# EAGLE board fullSketcht (EAGLE 7.6.0)

Size 160 x 129.21 mm. Coordinates in mm from the lower left corner, seen from the top.
Outline: 0,0 160,0 160,129.21 0,129.21 0,0
Copper layers (1*16): Top 0.035mm / dielectric 1.5mm / Bottom 0.035mm
Design rules "default": minimum track width 10mil, minimum drill 24mil, track to track 8mil, track to pad 8mil, pad to pad 8mil, via to via 8mil, smd to smd 8mil, copper to edge 40mil, drill to drill 8mil, minimum pad ring 10mil, minimum via ring 8mil, stop-mask expansion 4mil, vias tented up to drill 0mil, thermal gap 10mil
Net classes: 0 default: clearance 0.254 mm

## Footprints (pad centres in the part's own frame; a part is rotated, then mirrored left to right if it is on the bottom)
7SEG-13 = drill 0.813 long: 1 -5.08,-7.62; 2 -2.54,-7.62; 3 0,-7.62; 4 2.54,-7.62; 5 5.08,-7.62; 6 5.08,7.62; 7 2.54,7.62; 8 0,7.62; 9 -2.54,7.62; 10 -5.08,7.62
SO16 = smd 0.66 x 2.032: 1 -4.445,-3.073; 2 -3.175,-3.073; 3 -1.905,-3.073; 4 -0.635,-3.073; 5 0.635,-3.073; 6 1.905,-3.073; 7 3.175,-3.073; 8 4.445,-3.073; 9 4.445,3.073; 10 3.175,3.073; 11 1.905,3.073; 12 0.635,3.073; 13 -0.635,3.073; 14 -1.905,3.073; 15 -3.175,3.073; 16 -4.445,3.073
DIL18 = drill 0.813 long: 1 -10.16,-3.81; 2 -7.62,-3.81; 3 -5.08,-3.81; 4 -2.54,-3.81; 5 0,-3.81; 6 2.54,-3.81; 7 5.08,-3.81; 8 7.62,-3.81; 9 10.16,-3.81; 10 10.16,3.81; 11 7.62,3.81; 12 5.08,3.81; 13 2.54,3.81; 14 0,3.81; 15 -2.54,3.81; 16 -5.08,3.81; 17 -7.62,3.81; 18 -10.16,3.81
TO18 = drill 0.813 octagon: 1 -1.27,-1.27; 2 1.27,-1.27; 3 1.27,1.27
22-23-2081 = drill 1 long: 1 -8.89,0; 2 -6.35,0; 3 -3.81,0; 4 -1.27,0; 5 1.27,0; 6 3.81,0; 7 6.35,0; 8 8.89,0

## Placement (x,y rotation side)
D1  [7SEG-13]  35.56,71.12 0 top
D2  [7SEG-13]  48.26,71.12 0 top
D3  [7SEG-13]  60.96,71.12 0 top
D4  [7SEG-13]  73.66,71.12 0 top
D5  [7SEG-13]  86.36,71.12 0 top
D6  [7SEG-13]  99.06,71.12 0 top
D7  [7SEG-13]  111.76,71.12 0 top
D8  [7SEG-13]  124.46,71.12 0 top
D9  [7SEG-13]  8.89,44.45 0 top
D10  [7SEG-13]  21.59,44.45 0 top
D11  [7SEG-13]  34.29,44.45 0 top
D12  [7SEG-13]  46.99,44.45 0 top
D13  [7SEG-13]  59.69,44.45 0 top
D14  [7SEG-13]  88.9,44.45 0 top
D15  [7SEG-13]  101.6,44.45 0 top
D16  [7SEG-13]  114.3,44.45 0 top
D17  [7SEG-13]  127,44.45 0 top
D18  [7SEG-13]  139.7,44.45 0 top
D19  [7SEG-13]  8.89,22.86 0 top
D20  [7SEG-13]  21.59,22.86 0 top
D21  [7SEG-13]  34.29,22.86 0 top
D22  [7SEG-13]  46.99,22.86 0 top
D23  [7SEG-13]  59.69,22.86 0 top
D24  [7SEG-13]  88.9,22.86 0 top
D25  [7SEG-13]  101.6,22.86 0 top
D26  [7SEG-13]  114.3,22.86 0 top
D27  [7SEG-13]  127,22.86 0 top
D28  [7SEG-13]  139.7,22.86 0 top
D29  [7SEG-13]  8.89,3.81 0 top
D30  [7SEG-13]  21.59,3.81 0 top
D31  [7SEG-13]  34.29,3.81 0 top
D32  [7SEG-13]  46.99,3.81 0 top
D33  [7SEG-13]  59.69,3.81 0 top
D34  [7SEG-13]  88.9,3.81 0 top
D35  [7SEG-13]  101.6,3.81 0 top
D36  [7SEG-13]  114.3,3.81 0 top
D37  [7SEG-13]  127,3.81 0 top
D38  [7SEG-13]  139.7,3.81 0 top
IC1  74LS595D  [SO16]  87.63,95.25 0 top
IC2  74HC595D  [SO16]  87.63,120.65 0 top
IC3  74HC595D  [SO16]  58.42,118.11 0 top
IC4  74HC595D  [SO16]  101.6,107.95 0 top
IC5  74HC595D  [SO16]  139.7,101.6 0 top
IC6  [DIL18]  120.65,115.57 0 top
IC7  [DIL18]  73.66,105.41 0 top
IC8  [DIL18]  26.67,113.03 0 top
IC9  [DIL18]  33.02,88.9 0 top
IC10  [DIL18]  124.46,90.17 0 top
T1  2N2222  [TO18]  15.24,106.68 0 top
T2  2N2222  [TO18]  15.24,100.33 0 top
T3  2N2222  [TO18]  15.24,93.98 0 top
T4  2N2222  [TO18]  15.24,87.63 0 top
T5  2N2222  [TO18]  15.24,81.28 0 top
T6  2N2222  [TO18]  15.24,74.93 0 top
T7  2N2222  [TO18]  15.24,68.58 0 top
T8  2N2222  [TO18]  15.24,62.23 0 top
X1  22-23-2081  [22-23-2081]  5.08,88.9 90 top

## Library data of the parts
D1-D38 = special
IC1 = 74xx-us
IC2-IC5 = 74xx-eu
IC6-IC10 = uln-udn
T1-T8 = transistor
X1 = con-molex; MF: MOLEX; MPN: 22-23-2081; OC_FARNELL: 1756826; OC_NEWARK: 01C7592

## Nets
A: D1.7 D2.7 D3.7 D4.7 D5.7 D6.7 D7.7 D8.7 D9.7 D10.7 D11.7 D12.7 D13.7 D14.7 D15.7 D16.7 D17.7 D18.7 D19.7 D20.7 D21.7 D22.7 D23.7 D24.7 D25.7 D26.7 D27.7 D28.7 D29.7 D30.7 D31.7 D32.7 D33.7 D34.7 D35.7 D36.7 D37.7 D38.7 T1.1
B: D1.6 D2.6 D3.6 D4.6 D5.6 D6.6 D7.6 D8.6 D9.6 D10.6 D11.6 D12.6 D13.6 D14.6 D15.6 D16.6 D17.6 D18.6 D19.6 D20.6 D21.6 D22.6 D23.6 D24.6 D25.6 D26.6 D27.6 D28.6 D29.6 D30.6 D31.6 D32.6 D33.6 D34.6 D35.6 D36.6 D37.6 D38.6 T2.1
B1: T1.2 X1.8
B2: T2.2 X1.7
B3: T3.2 X1.6
B4: T4.2 X1.5
B5: T5.2 X1.4
B6: T6.2 X1.3
B7: T7.2 X1.2
B8: T8.2 X1.1
C: D1.4 D2.4 D3.4 D4.4 D5.4 D6.4 D7.4 D8.4 D9.4 D10.4 D11.4 D12.4 D13.4 D14.4 D15.4 D16.4 D17.4 D18.4 D19.4 D20.4 D21.4 D22.4 D23.4 D24.4 D25.4 D26.4 D27.4 D28.4 D29.4 D30.4 D31.4 D32.4 D33.4 D34.4 D35.4 D36.4 D37.4 D38.4 T3.1
D: D1.2 D2.2 D3.2 D4.2 D5.2 D6.2 D7.2 D8.2 D9.2 D10.2 D11.2 D12.2 D13.2 D14.2 D15.2 D16.2 D17.2 D18.2 D19.2 D20.2 D21.2 D22.2 D23.2 D24.2 D25.2 D26.2 D27.2 D28.2 D29.2 D30.2 D31.2 D32.2 D33.2 D34.2 D35.2 D36.2 D37.2 D38.2 T4.1
DS: IC1.14
E: D1.1 D2.1 D3.1 D4.1 D5.1 D6.1 D7.1 D8.1 D9.1 D10.1 D11.1 D12.1 D13.1 D14.1 D15.1 D16.1 D17.1 D18.1 D19.1 D20.1 D21.1 D22.1 D23.1 D24.1 D25.1 D26.1 D27.1 D28.1 D29.1 D30.1 D31.1 D32.1 D33.1 D34.1 D35.1 D36.1 D37.1 D38.1 T5.1
F: D1.9 D2.9 D3.9 D4.9 D5.9 D6.9 D7.9 D8.9 D9.9 D10.9 D11.9 D12.9 D13.9 D14.9 D15.9 D16.9 D17.9 D18.9 D19.9 D20.9 D21.9 D22.9 D23.9 D24.9 D25.9 D26.9 D27.9 D28.9 D29.9 D30.9 D31.9 D32.9 D33.9 D34.9 D35.9 D36.9 D37.9 D38.9 T6.1
G: D1.10 D2.10 D3.10 D4.10 D5.10 D6.10 D7.10 D8.10 D9.10 D10.10 D11.10 D12.10 D13.10 D14.10 D15.10 D16.10 D17.10 D18.10 D19.10 D20.10 D21.10 D22.10 D23.10 D24.10 D25.10 D26.10 D27.10 D28.10 D29.10 D30.10 D31.10 D32.10 D33.10 D34.10 D35.10 D36.10 D37.10 D38.10 T7.1
GND: IC1.8 IC1.13 IC2.8 IC2.13 IC3.8 IC3.13 IC4.8 IC4.13 IC5.8 IC5.13 IC6.9 IC7.9 IC8.9 IC9.9 IC10.9
H: D1.5 D2.5 D3.5 D4.5 D5.5 D6.5 D7.5 D8.5 D9.5 D10.5 D11.5 D12.5 D13.5 D14.5 D15.5 D16.5 D17.5 D18.5 D19.5 D20.5 D21.5 D22.5 D23.5 D24.5 D25.5 D26.5 D27.5 D28.5 D29.5 D30.5 D31.5 D32.5 D33.5 D34.5 D35.5 D36.5 D37.5 D38.5 T8.1
MR: IC1.10 IC2.10 IC3.10 IC4.10 IC5.10
N$86: IC1.15 IC6.1
N$87: IC1.1 IC6.2
N$88: IC1.2 IC6.3
N$89: IC1.3 IC6.4
N$90: IC1.4 IC6.5
N$91: IC1.5 IC6.6
N$92: IC1.6 IC6.7
N$93: IC1.7 IC6.8
N$94: IC1.9 IC2.14
N$95: IC2.15 IC7.1
N$96: IC2.1 IC7.2
N$97: IC2.2 IC7.3
N$98: IC2.3 IC7.4
N$99: IC2.4 IC7.5
N$100: IC2.5 IC7.6
N$101: IC2.6 IC7.7
N$102: IC2.7 IC7.8
N$103: IC2.9 IC3.14
N$104: IC3.15 IC8.1
N$105: IC3.1 IC8.2
N$106: IC3.2 IC8.3
N$107: IC3.3 IC8.4
N$108: IC3.4 IC8.5
N$109: IC3.5 IC8.6
N$110: IC3.6 IC8.7
N$111: IC3.7 IC8.8
N$112: IC3.9 IC4.14
N$113: IC4.15 IC9.1
N$114: IC4.1 IC9.2
N$115: IC4.2 IC9.3
N$116: IC4.3 IC9.4
N$117: IC4.4 IC9.5
N$118: IC4.5 IC9.6
N$119: IC4.6 IC9.7
N$120: IC4.7 IC9.8
N$121: IC4.9 IC5.14
N$122: IC5.15 IC10.1
N$123: IC5.1 IC10.2
N$124: IC5.2 IC10.3
N$125: IC5.3 IC10.4
N$126: IC5.4 IC10.5
N$127: IC5.5 IC10.6
N$128: IC5.6 IC10.7
N$129: IC5.7 IC10.8
SEG1: D1.3 IC6.18
SEG2: D2.3 IC6.17
SEG3: D3.3 IC6.16
SEG4: D4.3 IC6.15
SEG5: D5.3 IC6.14
SEG6: D6.3 IC6.13
SEG7: D7.3 IC6.12
SEG8: D8.3 IC6.11
SEG9: D9.3 IC7.18
SEG10: D10.3 IC7.17
SEG11: D11.3 IC7.16
SEG12: D12.3 IC7.15
SEG13: D13.3 IC7.14
SEG14: D14.3 IC7.13
SEG15: D15.3 IC7.12
SEG16: D16.3 IC7.11
SEG17: D17.3 IC8.18
SEG18: D18.3 IC8.17
SEG19: D19.3 IC8.16
SEG20: D20.3 IC8.15
SEG21: D21.3 IC8.14
SEG22: D22.3 IC8.13
SEG23: D23.3 IC8.12
SEG24: D24.3 IC8.11
SEG25: D25.3 IC9.18
SEG26: D26.3 IC9.17
SEG27: D27.3 IC9.16
SEG28: D28.3 IC9.15
SEG29: D29.3 IC9.14
SEG30: D30.3 IC9.13
SEG31: D31.3 IC9.12
SEG32: D32.3 IC9.11
SEG33: D33.3 IC10.18
SEG34: D34.3 IC10.17
SEG35: D35.3 IC10.16
SEG36: D36.3 IC10.15
SEG37: D37.3 IC10.14
SEG38: D38.3 IC10.13
SH_CP: IC1.11 IC2.11 IC3.11 IC4.11 IC5.11
ST_CP: IC1.12 IC2.12 IC3.12 IC4.12 IC5.12
VCC: IC1.16 IC2.16 IC3.16 IC4.16 IC5.16 IC6.10 IC7.10 IC8.10 IC9.10 IC10.10 T1.3 T2.3 T3.3 T4.3 T5.3 T6.3 T7.3 T8.3

## Tracks (layer width: path | path; a pad name or v marks a point on that pad's centre or on a via)
A  (38 unrouted)
B  (38 unrouted)
B1  (1 unrouted)
B2  (1 unrouted)
B3  (1 unrouted)
B4  (1 unrouted)
B5  (1 unrouted)
B6  (1 unrouted)
B7  (1 unrouted)
B8  (1 unrouted)
C  (38 unrouted)
D  (38 unrouted)
E  (38 unrouted)
F  (38 unrouted)
G  (38 unrouted)
GND  (14 unrouted)
H  (38 unrouted)
MR  (4 unrouted)
N$86  (1 unrouted)
N$87  (1 unrouted)
N$88  (1 unrouted)
N$89  (1 unrouted)
N$90  (1 unrouted)
N$91  (1 unrouted)
N$92  (1 unrouted)
N$93  (1 unrouted)
N$94  (1 unrouted)
N$95  (1 unrouted)
N$96  (1 unrouted)
N$97  (1 unrouted)
N$98  (1 unrouted)
N$99  (1 unrouted)
N$100  (1 unrouted)
N$101  (1 unrouted)
N$102  (1 unrouted)
N$103  (1 unrouted)
N$104  (1 unrouted)
N$105  (1 unrouted)
N$106  (1 unrouted)
N$107  (1 unrouted)
N$108  (1 unrouted)
N$109  (1 unrouted)
N$110  (1 unrouted)
N$111  (1 unrouted)
N$112  (1 unrouted)
N$113  (1 unrouted)
N$114  (1 unrouted)
N$115  (1 unrouted)
N$116  (1 unrouted)
N$117  (1 unrouted)
N$118  (1 unrouted)
N$119  (1 unrouted)
N$120  (1 unrouted)
N$121  (1 unrouted)
N$122  (1 unrouted)
N$123  (1 unrouted)
N$124  (1 unrouted)
N$125  (1 unrouted)
N$126  (1 unrouted)
N$127  (1 unrouted)
N$128  (1 unrouted)
N$129  (1 unrouted)
SEG1  (1 unrouted)
SEG2  (1 unrouted)
SEG3  (1 unrouted)
SEG4  (1 unrouted)
SEG5  (1 unrouted)
SEG6  (1 unrouted)
SEG7  (1 unrouted)
SEG8  (1 unrouted)
SEG9  (1 unrouted)
SEG10  (1 unrouted)
SEG11  (1 unrouted)
SEG12  (1 unrouted)
SEG13  (1 unrouted)
SEG14  (1 unrouted)
SEG15  (1 unrouted)
SEG16  (1 unrouted)
SEG17  (1 unrouted)
SEG18  (1 unrouted)
SEG19  (1 unrouted)
SEG20  (1 unrouted)
SEG21  (1 unrouted)
SEG22  (1 unrouted)
SEG23  (1 unrouted)
SEG24  (1 unrouted)
SEG25  (1 unrouted)
SEG26  (1 unrouted)
SEG27  (1 unrouted)
SEG28  (1 unrouted)
SEG29  (1 unrouted)
SEG30  (1 unrouted)
SEG31  (1 unrouted)
SEG32  (1 unrouted)
SEG33  (1 unrouted)
SEG34  (1 unrouted)
SEG35  (1 unrouted)
SEG36  (1 unrouted)
SEG37  (1 unrouted)
SEG38  (1 unrouted)
SH_CP  (4 unrouted)
ST_CP  (4 unrouted)
VCC  (17 unrouted)